# Altium PCB SUBBOARD-current_measurement.PcbDoc
Units mm, origin at the board's own origin, x right, y up, seen from the top; angles counter-clockwise.
Board outline 29.65 x 20.55 mm, 2 copper layers (Top Layer, Bottom Layer), stack 1.569 mm thick; 13 components, 10 nets, 56 pads, 9 vias.
Unrouted connection lines stored in the file: 1.
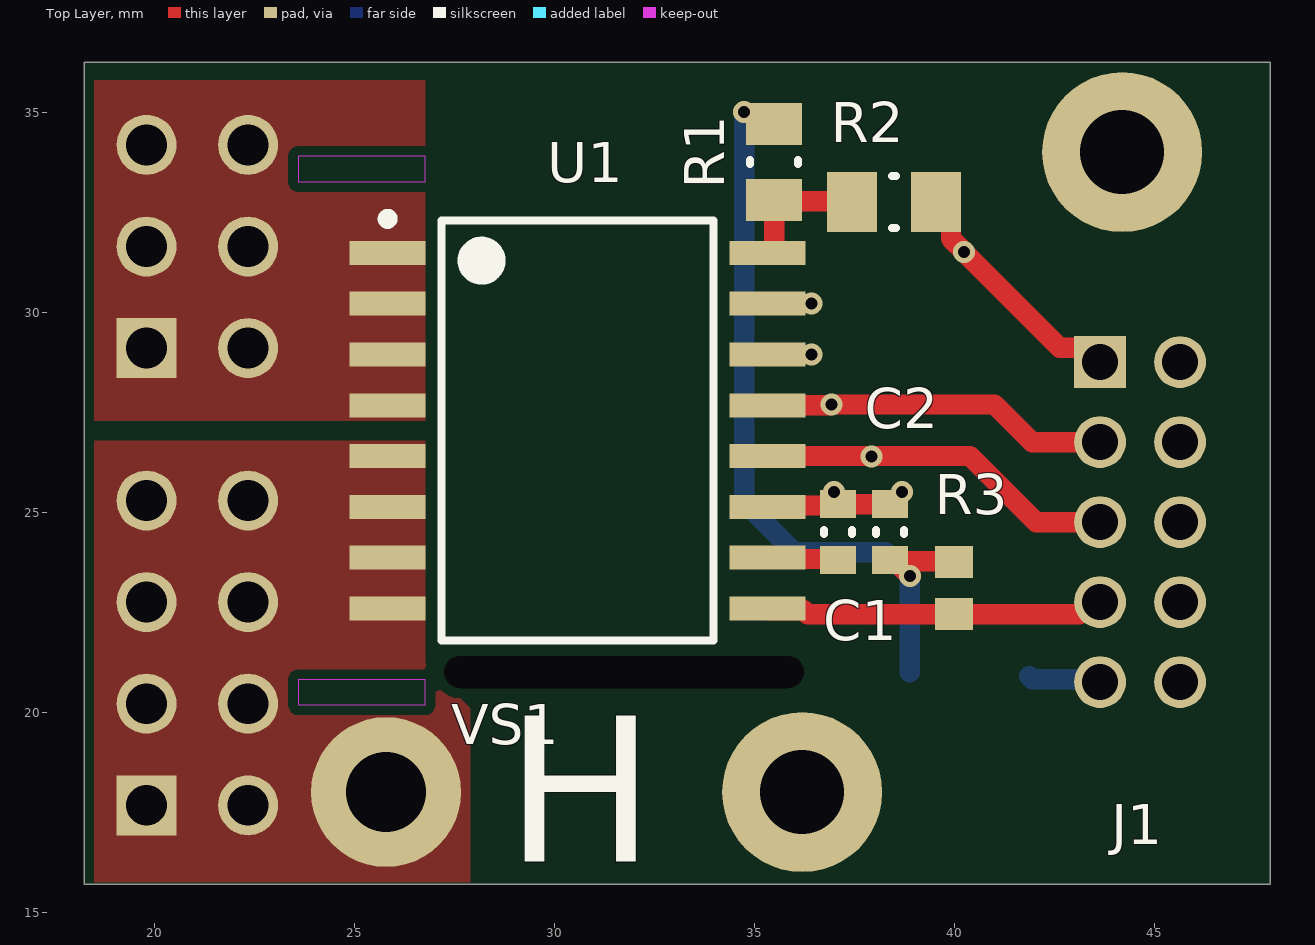
[diagram p0: Top Layer view]
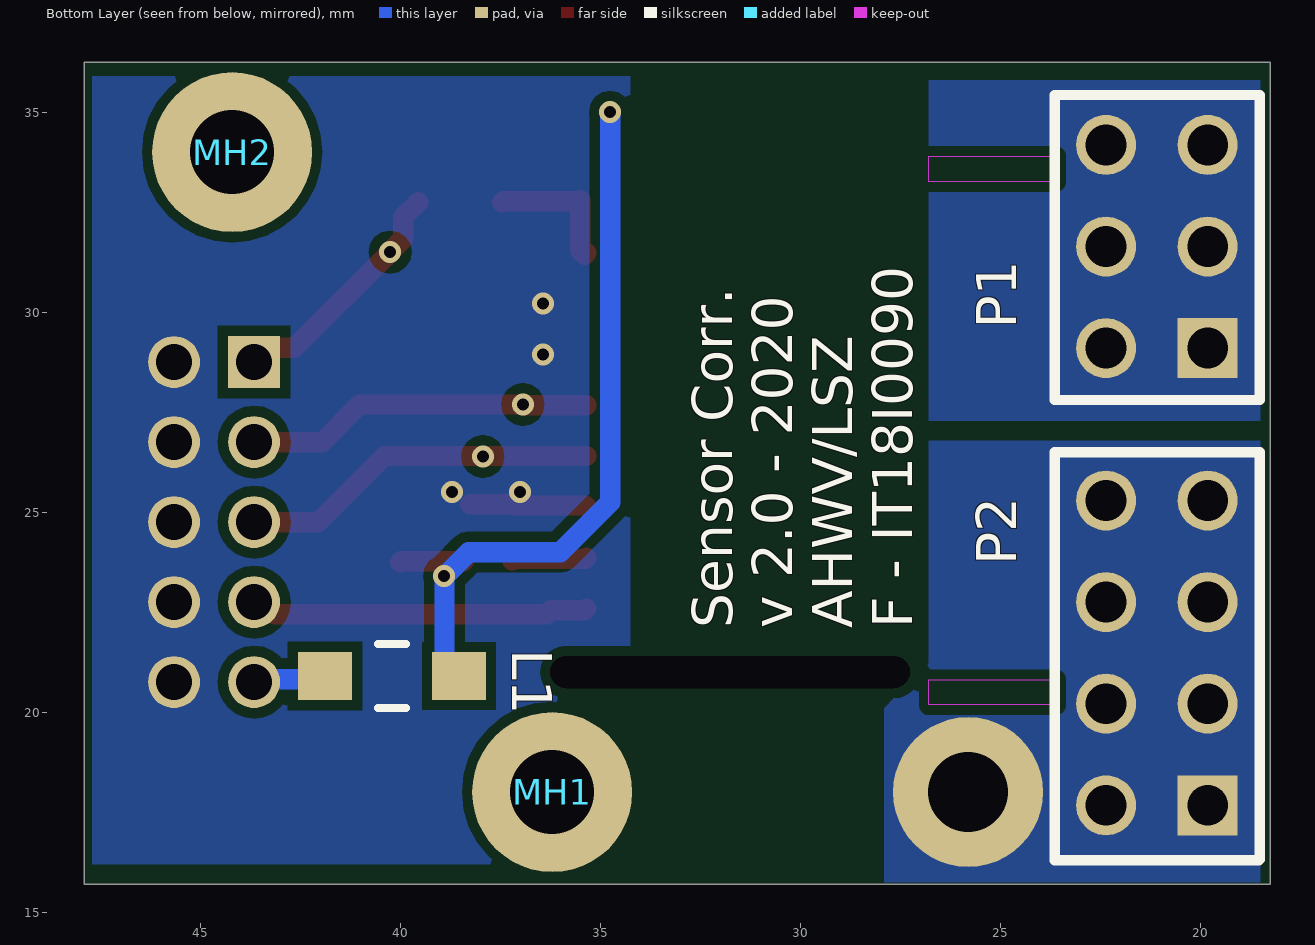
[diagram p1: Bottom Layer view, seen from below]
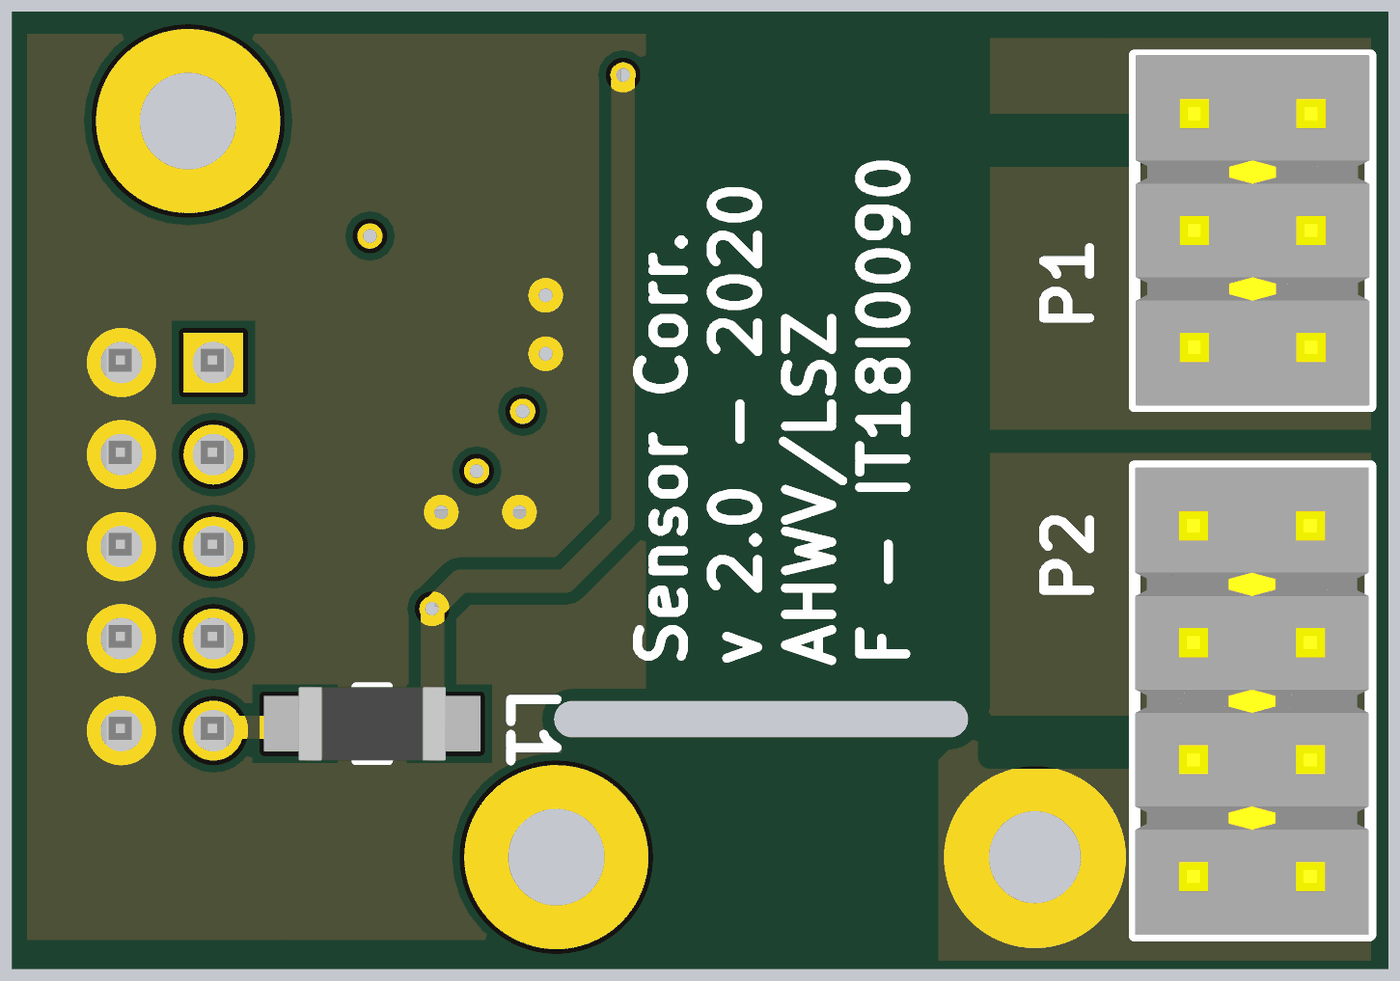
[diagram p2: 3D render of the assembled board from below, using the file's embedded part models]

## Layer stack, top to bottom
Top Solder: solder mask 0.0254, SM-001, Dk 4
Top Layer: signal copper 0.035
Dielectric 1: core 1.4986, Core-043, Dk 4.3
Bottom Layer: signal copper 0.035
Bottom Solder: solder mask 0.0254, SM-001, Dk 4

## Board outline
18.25,15.7 18.25,36.25 47.9,36.25 47.9,15.7

## Design rules (kind name [scope] priority, off if disabled: settings)
Clearance [All] p1: gap=0.254 ignorepadtopadclearanceinfootprint=FALSE except(0: Arc-Hole Track-Hole SMDPad-Hole THPad-Hole Via-Hole Fill-Hole Poly-Hole Region-Hole Text-Hole)
PolygonConnect [All] p1: connectstyle=Direct reliefconductorwidth=0.254 reliefentries=4 polygonreliefangle="90 Angle" airgapwidth=0.254
RoomDefinition SUBBOARD-current_measurement [InComponentClass('SUBBOARD-current_measurement')] p1: confinementstyle=ConfineIn formatcopy=TRUE lockcomponents=FALSE outline 12.555,7 58,7 58,39.675 12.555,39.675
RoutingVias [All] p1: holewidth=0.711 width=1.27 viastyle="Through Hole" minholewidth=0.711 minwidth=1.27 maxholewidth=0.711 maxwidth=1.27
SolderMaskExpansion [All] p1: expansion=0.102 istentingtop=FALSE
Width [All] p1: maxlimit=1.016 minlimit=0.254 preferedwidth=0.508 minimp=50.000000 maximp=50.000000 favimp=50.000000
30 further rules are at their usual default settings.

## Components (designator, comment, footprint, x,y, rotation, side; value= is the part's Value field where it differs from the comment)
C1 "CAP 100nF 10V 0603(1608)" CAPC0603(1608)100_L 37.1,24.5 r270 top value=100nF
C2 "CAP 1uF 50V 0603(1608)" CAPC0603(1608)100_L 38.4,24.5 r270 top value=1uF
J1 "0878311020" 0878311020 43.65,28.75 r0 top
L1 "742792111" SMD-1206 40.2,20.9 r180 bottom
MH1 "9774020633R" 9774020633R#1 41.2,17.25 r180 bottom
MH2 "9774020633R" 9774020633R#2 44.2,34 r180 bottom
P1 "TSW-103-15-G-D" TSW-103-15-G-D 19.81,29.1 r0 bottom
P2 "TSW-104-15-G-D" TSW-104-15-G-D 19.81,17.67 r0 bottom
R1 "33K 5% 0805(2012)" RESC0805(2012)_N 35.5,33.75 r90 top value="33000.00 Ohm"
R2 "33K 5% 0805(2012)" RESC0805(2012)_M 38.5,32.75 r180 top value="33000.00 Ohm"
R3 "CRCW060310K0FKEA" RESC1609X50X30NL8T20 40,23.1 r270 top value="10000 Ohm"
U1 "MCA1101-20-03" SOIC127P1030X265-16N 30.589,27.036 r0 top
VS1 "Voltage_Probe" "Voltage Probe" 25.8,18 r0 top

## Footprints (in the part's own frame and the unit in brackets; to place one, negate y for a bottom-side part, rotate by r counter-clockwise, add the part's x,y. Pads: shape width x height; smd on the part's side, far side on the other; paste and mask are expansions set on the pad)
0878311020 [mm]
  rect 1.3x1.3 hole 0.9: 1(0,0)
  round 1.3 hole 0.9: 2(2,0) 3(0,-2) 4(2,-2) 5(0,-4) 6(2,-4) 7(0,-6) 8(2,-6) 9(0,-8) 10(2,-8)
  body extent -2.12,-10.28 4.18,2.37, height 6.41
9774020633R#1 [mm] "SMT STEEL SPACER, M1.6 INTERNAL"
  round 4 hole 2.1: *(5,0.75)
9774020633R#2 [mm] "SMT STEEL SPACER, M1.6 INTERNAL"
  round 4 hole 2.1: *(0,0)
CAPC0603(1608)100_L [mm] "Chip Capacitor, Body 1.6x0.8mm, Height 1.0mm, IPC High Density"
  rect 0.7x0.9 smd: 1(-0.7,0) 2(0.7,0)
  silkscreen extent -0.05,-0.35 0.05,0.35, body extent -0.87,-0.47 0.88,0.48, height 1
RESC0805(2012)_M [mm] "Chip Resistor, Body 2.0x1.3mm, IPC Low Density"
  rect 1.25x1.5 smd: 1(-1.05,0) 2(1.05,0)
  silkscreen extent -0.05,-0.65 0.05,0.65, body extent -1.1,-0.67 1.1,0.67, height 0.7
RESC0805(2012)_N [mm] "Chip Resistor, Body 2.0x1.3mm, IPC Medium Density"
  rect 1.05x1.4 smd: 1(-0.95,0) 2(0.95,0)
  silkscreen extent -0.05,-0.6 0.05,0.6, body extent -1.1,-0.67 1.1,0.68, height 0.7
RESC1609X50X30NL8T20 [mm] "Chip Resistor, 2-Leads, Body 1.65x0.95mm, IPC Medium Density"
  rect 0.8x0.95 smd: 1(-0.65,0) 2(0.65,0)
  body extent -0.82,-0.48 0.82,0.48, height 0.5
SMD-1206 [mm] "Chip Inductor, 2-Leads, Body 3.2x1.6mm"
  rect 1.35x1.2 smd: 1(-1.675,0) 2(1.675,0)
  silkscreen extent -0.35,-0.8 0.35,0.8, body extent -1.6,-0.8 1.6,0.8, height 1.09
SOIC127P1030X265-16N [mm] "SOIC, 16-Leads, Body 10,30x7,50mm, Pitch 1,27mm, IPC Medium Density"
  rect 1.9x0.6 smd: 1(-4.75,4.445) 2(-4.75,3.175) 3(-4.75,1.905) 4(-4.75,0.635) 5(-4.75,-0.635) 6(-4.75,-1.905) 7(-4.75,-3.175) 8(-4.75,-4.445) 9(4.75,-4.445) 10(4.75,-3.175) 11(4.75,-1.905) 12(4.75,-0.635) 13(4.75,0.635) 14(4.75,1.905) 15(4.75,3.175) 16(4.75,4.445)
  silkscreen extent -4.87,-5.25 3.4,5.42, body extent -3.8,-5.25 3.8,5.25, height 2.65
TSW-103-15-G-D [mm]
  rect 1.5x1.5 hole 1.02: 1(0,0)
  round 1.5 hole 1.02: 2(2.54,0) 3(0,-2.54) 4(2.54,-2.54) 5(0,-5.08) 6(2.54,-5.08)
  silkscreen extent -1.3,-6.32 3.83,1.3, body extent -1.28,-6.33 3.8,1.29, height 15.76
TSW-104-15-G-D [mm]
  rect 1.5x1.5 hole 1.02: 1(0,0)
  round 1.5 hole 1.02: 2(2.54,0) 3(0,-2.54) 4(2.54,-2.54) 5(0,-5.08) 6(2.54,-5.08) 7(0,-7.62) 8(2.54,-7.62)
  silkscreen extent -1.3,-8.82 3.83,1.38, body extent -1.26,-8.8 3.82,1.36, height 15.76
"Voltage Probe" [mm]
  round 3.75 hole 2: 1(0,0)

## Part data
C1: library part CMP-1035-02580-1, "CAP 100nF 10V ±10% 0603 (1608 Metric) Thickness 1mm SMD", Case-EIA=0603, Case-Metric=1608, Rated Voltage="10 V", Tolerance=Â±10%, Max Thickness="1 mm", Technology=SMT
C2: library part CMP-1035-02746-1, "CAP 1uF 50V ±20% 0603 (1608 Metric) Thickness 1mm SMD", Case-EIA=0603, Case-Metric=1608, Rated Voltage="50 V", Tolerance=Â±20%, Max Thickness="1 mm", Technology=SMT
J1: "Conn Shrouded Header HDR 10 POS 2mm Solder ST Thru-Hole Milli-Grid™ Tube", Color=Black, Manufacturer=Molex, Max Operating Temperature=105°C, Min Operating Temperature=-55°C, Supplier Part Number 1=WM18560-ND, Category="Headers and Wire Housings", ComponentLink1Description=https://datasheet.ciiva.com/6814/878311620-sd-6814006.pdf?src-supplier=Digi-Key, ComponentLink1URL=https://datasheet.ciiva.com/6814/878311620-sd-6814006.pdf?src-supplier=Digi-Key, Connector Type="Male Pin", Contact Material=Bronze, Contact Mating Length=0.141inch, Contact Plating=Gold, Depth=6.3mm, Housing Color=Black, Housing Material=Nylon, Length=12.65mm, Manufacturer Part Number=0878311020, Mount="Through Hole", Number of Contacts=10, Number of Positions=10, Number of Rows=2, Orientation=Straight, Packaging=Rail/Tube, Pitch=2mm, Pricing 1="1=1.65000, 10=1.50100, 100=1.28650, 500=1.07206, 1000=0.91890, 5000=0.81476, 10000=0.79638 (USD)", Radiation Hardening=No, RoHS=Yes, Row Spacing=0.079inch, Stock 1=7937, Supplier 1=Digi-Key, Termination=Solder
L1: library part CMP-0220-00024-1, "SMD EMI Suppression Ferrite Bead WE-CBF, Z = 26 Ohm", ComponentLink1Description="Manufacturer Link", ComponentLink1URL=http://www.we-online.com, ComponentLink2Description=Datasheet, ComponentLink2URL=http://www.we-online.de/katalog/media/pdf/742792111.pdf, DatasheetVersion=Dec-2005, Impedance="26 Ohm", PackageDescription="Chip Inductor, 2-Leads, Body 3.2 x 1.6 mm", PackageReference=SMD-1206, PackageVersion=2007
MH1 MH2: Manufacturer="Wurth Electronics", Supplier Part Number 1=732-13689-1-ND, Category="Spacers, Standoffs", Manufacturer Part Number=9774020633R, Pricing 1="1=0.96000, 10=0.87700, 50=0.78160, 100=0.68590, 500=0.63800, 1000=0.59015 (USD)", RoHS=No, Stock 1=4105, Supplier 1=Digi-Key
P1: ".025\" SQ. TERMINAL STRIPS", Housing Color=Black, Manufacturer=Samtec, Max Current Rating=7.6A, Max Operating Temperature=125°C, Max Voltage Rating (AC)=550V, Min Operating Temperature=-55°C, Supplier Part Number 1=SAM12306-ND, Category="Headers and Wire Housings", ComponentLink1Description=https://datasheet.ciiva.com/16723/htsw-th-16723063.pdf?src-supplier=Avnet+Europe, ComponentLink1URL=https://datasheet.ciiva.com/16723/htsw-th-16723063.pdf?src-supplier=Avnet+Europe, ComponentLink2Description=https://datasheet.ciiva.com/29947/htsw-th-29947802.pdf?src-supplier=Avnet, ComponentLink2URL=https://datasheet.ciiva.com/29947/htsw-th-29947802.pdf?src-supplier=Avnet, Contact Material=Bronze, Contact Plating=Gold, Depth=5.08mm, Gender=Male, Housing Material=Polyester, Length=7.62mm, Manufacturer Part Number=TSW-103-15-G-D, Number of Contacts=6, Number of Rows=2, Orientation=Straight, Packaging=Bulk, Pitch=2.54mm, Pricing 1="1=0.78000, 10=0.73200, 100=0.56120, 500=0.48800, 1000=0.40260, 5000=0.35380, 10000=0.32940 (USD)", Pricing 2="1=0.78000, 10=0.58500, 100=0.51200, 500=0.48800, 1000=0.40200, 2500=0.35300 (USD)", Pricing 3="1=0.76330, 10=0.71550, 30=0.71464, 50=0.71372, 100=0.54645 (USD)", Radiation Hardening=No, REACH SVHC="No SVHC", RoHS=Yes, Row Spacing=2.54mm, Stock 1=480, Stock 2=570, Supplier 1=Digi-Key, Supplier 2=Mouser, Supplier 3=Avnet, Supplier Part Number 2=200-TSW10315GD, Supplier Part Number 3=TSW-103-15-G-D, Termination=Solder
P2: "SAMTEC         TSW-104-15-G-D             Board-To-Board Connector, Vertical, TSW Series, 8 Contacts, Header, 2.54 mm, Through Hole, 2 Rows", Housing Color=Black, Manufacturer=Samtec, Max Current Rating=7.6A, Max Operating Temperature=125°C, Max Voltage Rating (AC)=550V, Min Operating Temperature=-55°C, Supplier Part Number 1=SAM12313-ND, Category=Connectors, ComponentLink1Description=http://www.farnell.com/datasheets/1992055.pdf?src-supplier=Farnell, ComponentLink1URL=http://www.farnell.com/datasheets/1992055.pdf?src-supplier=Farnell, ComponentLink2Description=http://components.arrow.com/part/dataview/0323_01320648?src-supplier=Arrow+Europe, ComponentLink2URL=http://components.arrow.com/part/dataview/0323_01320648?src-supplier=Arrow+Europe, ComponentLink3Description=http://components.arrow.com/part/dataview/2678257S8321538N1004?src-supplier=Arrow, ComponentLink3URL=http://components.arrow.com/part/dataview/2678257S8321538N1004?src-supplier=Arrow, ComponentLink4Description=http://www.samtec.com/ftppub/pdf/htsw_th.pdf?src-supplier=Avnet, ComponentLink4URL=http://www.samtec.com/ftppub/pdf/htsw_th.pdf?src-supplier=Avnet, ComponentLink5Description=http://www.samtec.com/ftppub/pdf/htsw_th.pdf?src-supplier=Avnet+Europe, ComponentLink5URL=http://www.samtec.com/ftppub/pdf/htsw_th.pdf?src-supplier=Avnet+Europe, ComponentLink6Description=http://suddendocs.samtec.com/prints/tsw-xxx-xx-x-x-xx-xxx-footprint.pdf?src-supplier=Digi-Key, ComponentLink6URL=http://suddendocs.samtec.com/prints/tsw-xxx-xx-x-x-xx-xxx-footprint.pdf?src-supplier=Digi-Key, Contact Material=Bronze, Contact Plating=Gold, Depth=5.08mm, Gender=Male, Housing Material=Polyester, Length=10.16mm, Manufacturer Part Number=TSW-104-15-G-D, Number of Contacts=8, Number of Rows=2, Orientation=Straight, Packaging=Bulk, Pitch=2.54mm, Pricing 1="1=0.94000, 10=0.82900, 100=0.71500, 500=0.58500, 1000=0.52000, 5000=0.45500, 10000=0.43225 (USD)", Radiation Hardening=No, REACH SVHC="No SVHC", RoHS=Yes, Stock 1=33, Supplier 1=Digi-Key, Termination=Solder
R1 R2: library part CMP-1013-00110-1, "33K 0.125W 5% 0805 (2012 Metric)  SMD", Case-EIA=0805, Case-Metric=2012, Power="0.125 W", Tolerance="5 %", Technology=SMT
R3: library part CMP-1666-00005-4, "Chip Resistor, 10 KOhm, +/- 1%, 100 mW, -55 to 155 degC, 0603 (1608 Metric), RoHS, Tape and Reel", Manufacturer="Vishay Semiconductor", Max Operating Temperature="155 degC", Min Operating Temperature="-55 degC", Package Quantity=5000, Voltage Rating="75 V", ComponentLink1Description="Manufacturer URL", ComponentLink1URL=http://www.vishay.com/, ComponentLink2Description=Datasheet, ComponentLink2URL=https://datasheet.ciiva.com/11809/0900766b80d98afc-11809037.pdf, DatasheetVersion=06/2012, Height="0.45 mm", Length="1.55 mm", Mounting Technology="Surface Mount", PackageDescription="2-Pin Surface Mount Device, Body 1.575 x 0.85 mm", PackageReference=0603, Packaging="Tape and Reel", REACH SVHC=Unknown, RoHSCompliant=true
U1: "High Accuracy Current Sensor IC with 1.5MHz 3dB Bandwidth and Isolation ±20A,, 3.3V, Ratiometric", Current Rating=20A, Manufacturer=ACEINNA, Mouser Part Number=438-MCA1101-20-3, Package/Case="SOIC 16", Supply voltage=3.3V, Datasheet Link=https://www.mouser.cl/datasheet/2/940/6020-1104-01_B_Datasheet_2c_Current_Sensor_Fix_Gai-1622847.pdf, Mouser Price/Stock=https://www.mouser.com/Search/Refine.aspx?Keyword=438-MCA1101-20-3

## Free pads (board coordinates)
  round 0.5 hole 0.8 slot 9 at 0 deg unplated: *(31.75,21)

## Via types
v1: diameter 0.55, hole 0.3, Top Layer to Bottom Layer, 9 vias

## Nets (pads, with @x,y where several pads share a name; then routed paths per layer and width w, separated by ;. In a path a pad name is that pad's centre, name@x,y a point inside that pad or via, vN(x,y) a via of type N, cw(c..) or ccw(c..) an arc to the next point about the centre after c; other vN are vias at no path point)
FLTOC: J1.7 R3.2 U1.9 | length 8.5
  Top Layer w0.508: U1.9 35.385,22.545 36.238,22.545 36.333,22.45 R3.2 43.136,22.45 43.436,22.75 J1.7
GND: C1.1 C2.1 J1.2 J1.4 J1.6 J1.8 J1.10 U1.11 U1.14 U1.15 | length 2.9
  Top Layer w0.508: U1.11 35.371,25.163 37.161,25.163 37.193,25.196 C2.1@38.25,25.196
  other v1: 37,25.5 38.7,25.5 36.431,28.941 36.431,30.211
IP_N: P2.1 P2.2 P2.3 P2.4 P2.5 P2.6 P2.7 P2.8 U1.5 U1.6 U1.7 U1.8 VS1.1
IP_P: P1.1 P1.2 P1.3 P1.4 P1.5 P1.6 U1.1 U1.2 U1.3 U1.4
NetR1_1: R1.1 R2.2 U1.16 | length 3.5
  Top Layer w0.508: U1.16@35.385,31.435 U1.16 35.454,31.481 35.5,31.527 R1.1 35.525,32.775 37.425,32.775 R2.2
RSTOC: J1.1 R2.1 | length 6.1
  Top Layer w0.508: R2.1 39.921,32.379 39.921,31.84 40.261,31.5 v1(40.25,31.5) 42.644,29.106 43.294,29.106 J1.1
VCC1_3V3: C1.2 C2.2 L1.2 R1.2 R3.1 U1.10 | length 21.2
  Top Layer w0.508: U1.10 35.371,23.828 37.16,23.828 C1.2@37.193,23.796 ; v1(38.9,23.4) C2.2@38.525,23.775 ; R3.1 39.975,23.775 C2.2@38.525,23.775 ; C2.2@38.525,23.775 38.425,23.775 C2.2 38.5,23.8 C2.2@38.525,23.775
  Bottom Layer w0.508: v1(34.75,35) 34.75,25.25 36,24 38.289,24 38.889,23.4 v1(38.9,23.4) 38.892,23.392 L1.2@38.892,21
VCC_3V3: J1.9 L1.1 | length 1.8
  Bottom Layer w0.508: L1.1 41.95,20.825 43.575,20.825 J1.9
Vout: J1.5 U1.12 | length 9
  Top Layer w0.508: U1.12 37.931,26.401 40.399,26.401 42.05,24.75 J1.5
  other v1: 37.931,26.391
Vref: J1.3 U1.13 | length 8.7
  Top Layer w0.508: U1.13 36.9,27.671 36.92,27.691 v1(36.931,27.691) 41.009,27.691 41.95,26.75 J1.3
pads on no net: MH1.* MH2.*

## Polygon pours and split planes (outlines as drawn)
GND on Bottom Layer "GND_L-02_P-001" (solid, pour order 0): 47.7,16.2 34.25,16.2 34.25,35.9 47.7,35.9
IP_N on Bottom Layer "IP_N_L-02_P-001" (solid, pour order 4): 26.779,26.782 26.779,21.221 27.9,20.1 27.9,15.75 18.5,15.75 18.5,26.782
IP_P on Bottom Layer "IP_P_L-02_P-001" (solid, pour order 3): 26.779,35.799 26.779,27.29 18.5,27.29 18.5,35.799
IP_N on Top Layer "IP_N_L-01_P-001" (solid, pour order 2): 26.779,26.782 26.779,21.221 27.9,20.1 27.9,15.75 18.5,15.75 18.5,26.782
IP_P on Top Layer "IP_P_L-01_P-001" (solid, pour order 1): 26.779,35.799 26.779,27.29 18.5,27.29 18.5,35.799

## Keep-outs
Keep-Out Layer:
  rectangle: 23.604,20.178 26.779,20.813
  rectangle: 23.604,33.259 26.779,33.894

## Silkscreen, mask and mechanical layers (free items; w line width, h text height)
Top Overlay:
  text "H" at 28.776,14.926 h7
Bottom Overlay:
  text "Sensor Corr. / v 2.0 - 2020 / AHWV/LSZ / F - IT18I0090" at 27.2,22.1 h1 r270
Board:
  the board outline again, w0.254

## Dimensions
36.2,18 to 44.2,34 on Dimensions
44.2,34 to 36.2,18 on Dimensions
47.9,36.25 to 47.9,15.7 on Dimensions
18.25,15.7 to 47.9,15.7 on Dimensions
19.81,29.1 to 19.81,25.29 on Dimensions